# Altium PCB JacdacModuleTesterEc30 91.PcbDoc (part 1 of 2)
Units mm, origin at the board's own origin, x right, y up, seen from the top; angles counter-clockwise.
Board outline 25 x 48 mm, 2 copper layers (Top Layer, Bottom Layer), stack 1.525 mm thick; 43 components, 32 nets, 150 pads, 34 vias.
Unrouted connection lines stored in the file: 18.
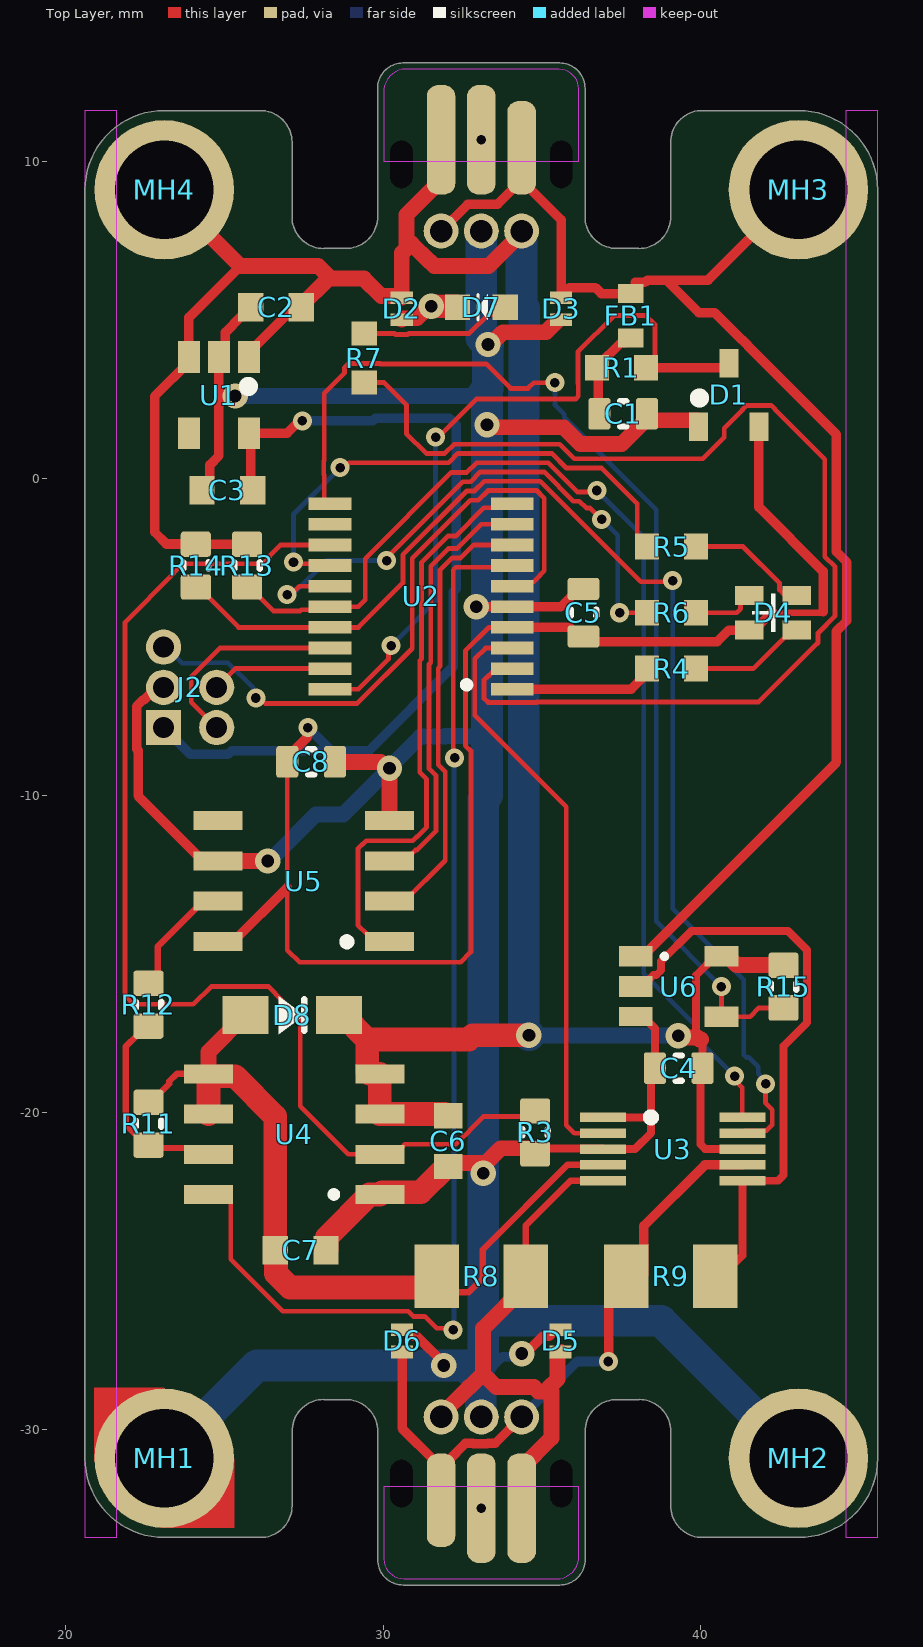
[diagram p0: Top Layer view]
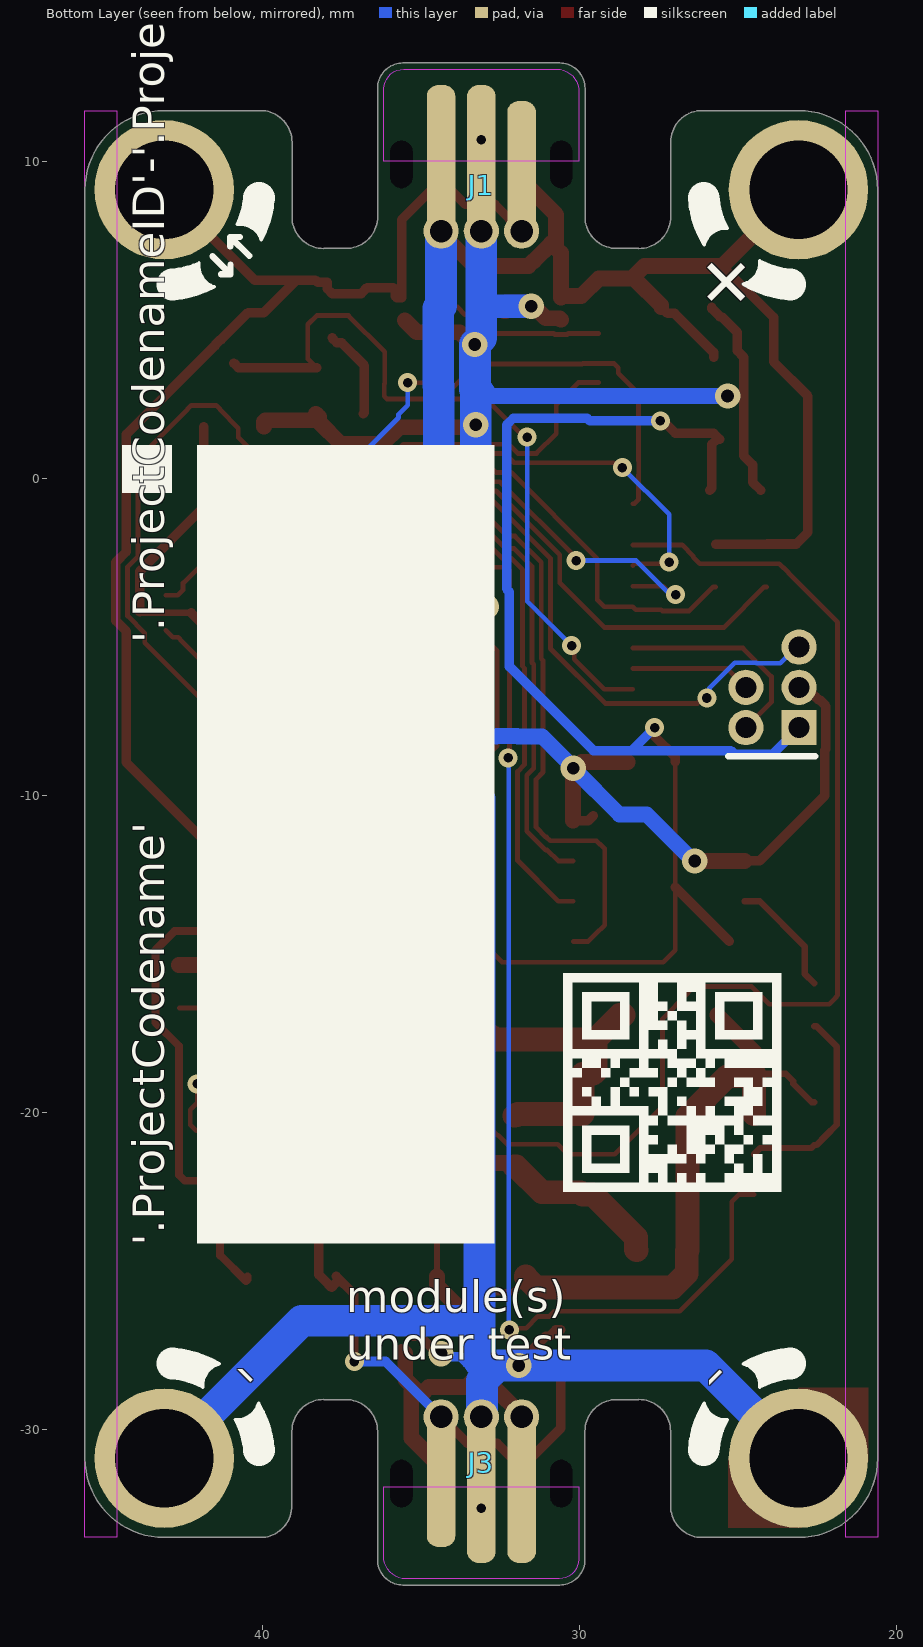
[diagram p1: Bottom Layer view, seen from below]
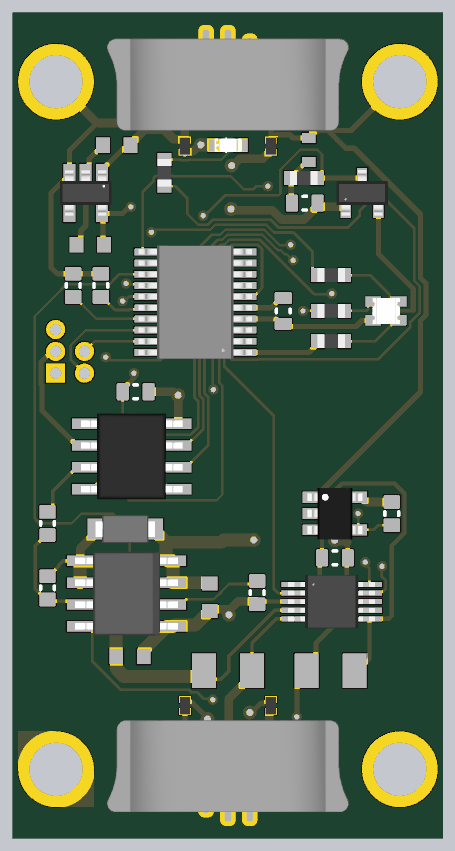
[diagram p2: 3D render of the assembled board from above, using the file's embedded part models]

## Layer stack, top to bottom
Top Solder: solder mask 0.0102, Solder Resist, Dk 3.5
Top Layer: signal copper 0.0356
Dielectric 1: core 1.454, FR-4, Dk 4.2
Bottom Layer: signal copper 0.0356
Bottom Solder: solder mask 0.0102, Solder Resist, Dk 3.5

## Board outline
23.1,-33.4 26.134,-33.4 26.133,-33.4 ccw(c26.133,-32.4) 27.133,-32.4 27.134,-32.4 27.134,-30.048 27.133,-30.048 cw(c28.133,-30.048) 28.133,-29.048 28.134,-29.05 28.834,-29.05 28.833,-29.05 cw(c28.833,-30.05) 29.833,-30.05 29.834,-30.05 29.834,-34.1 29.833,-34.1 ccw(c30.633,-34.1) 30.633,-34.9 30.634,-34.9 35.574,-34.9 35.573,-34.9 ccw(c35.573,-34.1) 36.373,-34.1 36.374,-34.098 36.374,-30.048 36.373,-30.05 cw(c37.373,-30.05) 37.373,-29.05 37.344,-29.05 38.074,-29.05 38.073,-29.048 cw(c38.073,-30.048) 39.073,-30.048 39.074,-30.048 39.074,-32.4 39.073,-32.4 ccw(c40.073,-32.4) 40.073,-33.4 40.074,-33.4 43.104,-33.4 43.1,-33.4 ccw(c43.1,-30.9) 45.6,-30.9 45.6,9.1 ccw(c43.1,9.1) 43.1,11.6 40.07,11.6 ccw(c40.07,10.6) 39.07,10.6 39.07,8.248 cw(c38.07,8.248) 38.07,7.248 38.07,7.25 37.37,7.25 cw(c37.37,8.25) 36.37,8.25 36.37,12.3 ccw(c35.57,12.3) 35.57,13.1 30.63,13.1 ccw(c30.63,12.3) 29.83,12.3 29.83,12.298 29.83,8.25 cw(c28.83,8.25) 28.83,7.25 28.86,7.25 28.13,7.25 28.13,7.248 cw(c28.13,8.248) 27.13,8.248 27.13,10.6 ccw(c26.13,10.6) 26.13,11.6 23.1,11.6 ccw(c23.1,9.1) 20.6,9.1 20.6,9.092 20.6,-30.9 ccw(c23.1,-30.9)

## Design rules (kind name [scope] priority, off if disabled: settings)
AssemblyTestPointUsage [All] p1: valid=2
BoardOutlineClearance [All] p1: gap=0.3 ignorepadtopadclearanceinfootprint=FALSE except(0: Arc-SplitContinuation Track-SplitContinuation SMDPad-SplitContinuation THPad-SplitContinuation Via-SplitContinuation Fill-SplitContinuation Poly-SplitContinuation Region-SplitContinuation Text-OutlineEdge Text-SplitContinuation; 0.2: Region-CavityEdge Region-CutoutEdge Region-SplitBarrior Text-CavityEdge Text-CutoutEdge Text-SplitBarrior)
Clearance [All] p1: gap=0.142 ignorepadtopadclearanceinfootprint=FALSE
ComponentClearance MH5.0KeepoutaAreaClearance [InComponent('MH1') or InComponent('MH2')  or InComponent('MH3') or InComponent('MH4') vs InComponent('D6') or InComponent('D7') or InComponent('D8') or InComponent('D9') or InComponent('D10') or InComponent('D11') or InComponent('D12') or InComponent('D13') or InComponent('C6') or InComponent('C7') or InComponent('C8')  or  InComponent('C9') or  InComponent('C12')] p1: gap=0 collisioncheckmode=3 verticalgap=0 showdistances=FALSE
ComponentClearance [All] p2: gap=0.2 collisioncheckmode=3 verticalgap=0.2 showdistances=FALSE
DiffPairsRouting [All] p1: maxlimit=2 minlimit=0.15 mostfreqgap=0.15 toplayer_minwidth=0.15 toplayer_maxwidth=2 toplayer_prefwidth=0.15 bottomlayer_minwidth=0.15 bottomlayer_maxwidth=2 bottomlayer_prefwidth=0.15 maxuncoupledlength=25
FabricationTestPointUsage [All] p1: valid=2 allowmultiple=FALSE
HoleSize [All] p1: absolutevalues=TRUE maxlimit=5 minlimit=0.2 maxpercent=80.000 minpercent=20.000
HoleToHoleClearance HoleToHoleClearance_J3_J4 [InComponent('J3') vs InComponent('J4')] p1: gap=2.54 allowstackedmicrovias=TRUE
HoleToHoleClearance [All] p2: gap=0.254 allowstackedmicrovias=TRUE
MinimumSolderMaskSliver [All] p1: minsoldermaskwidth=0.005
PlaneClearance [All] p1: clearance=0.3
PlaneConnect [All] p1: planeconnectstyle=Relief reliefexpansion=0.5 reliefentries=4 reliefconductorwidth=0.2 reliefairgap=0.3
PolygonConnect "PolygonConnect GND" [isVIA] p1: connectstyle=Relief reliefconductorwidth=0.2 reliefentries=4 polygonreliefangle="90 Angle" airgapwidth=0.2
PolygonConnect [All] p2: connectstyle=Relief reliefconductorwidth=0.2 reliefentries=4 polygonreliefangle="90 Angle" airgapwidth=0.2
RoutingVias RoutingVias_Power [InNetClass('Power')] p1: holewidth=0.4 width=0.8 viastyle="Through Hole" minholewidth=0.3 minwidth=0.6 maxholewidth=0.4 maxwidth=1
RoutingVias [All] p2: holewidth=0.3 width=0.6 viastyle="Through Hole" minholewidth=0.3 minwidth=0.6 maxholewidth=0.3 maxwidth=0.8
SilkToSilkClearance [All] p1: silktosilkclearance=0.001
SilkToSolderMaskClearance [IsPad] p1: minsilkscreentomaskgap=0.05 clearancetoexposedcopper=TRUE
SolderMaskExpansion [All] p1: expansion=0.075 istentingtop=FALSE
UnRoutedNet [All] p1: checkbadconnections=TRUE
ViasUnderSMD [not ( HasFootprint('JACDAC_EDGE_CONNECTOR_NO_TRACES') or HasFootprint('JACDAC_EDGE_CONNECTOR_NO_TRACES_CABLE_GUIDE') )] p1: allowed=FALSE
Width Width_Power [InNetClass('Power')] p1: maxlimit=1 minlimit=0.2 preferedwidth=0.5
Width [All] p2: maxlimit=1 minlimit=0.13 preferedwidth=0.13 minimp=50.000000 maximp=50.000000 favimp=50.000000
18 further rules are at their usual default settings.

## Classes and differential pairs
net class Power: GND JD_PWR JD_PWR_DUT JD_PWR_DUT2

## Components (designator, comment, footprint, x,y, rotation, side; value= is the part's Value field where it differs from the comment)
C1 "33pF" CAP0603 37.574,2.033 r180 top
C2 "CL10A475KP8NNNC" "CAP 0603 (1608) x 1.2mm" 26.627,5.402 r0 top
C3 "CL10A475KP8NNNC" "CAP 0603 (1608) x 1.2mm" 25.09,-0.375 r0 top
C4 "100nF" CAP0603 39.324,-18.6 r0 top
C5 "100nF" CAP0603 36.32,-4.238 r270 top
C6 "CL10A475KP8NNNC" "CAP 0603 (1608) x 1.2mm" 32.05,-20.9 r90 top
C7 "CL10A475KP8NNNC" "CAP 0603 (1608) x 1.2mm" 27.4,-24.34 r180 top
C8 "100nF" CAP0603 27.732,-8.94 r180 top
D1 "BAT54S" "NXP-BAT54S-TO-236AB - without outline" 40.904,2.633 r90 top
D2 "RCLAMP0521P-N" "TVS 0402 - L" 30.588,5.35 r270 top
D3 "RCLAMP0521P-N" "TVS 0402 - L" 35.614,5.35 r270 top
D4 "HSMF-C114" HSMF-C114 42.3,-4.238 r0 top
D5 "RCLAMP0521P-N" "TVS 0402 - L" 35.6,-27.2 r90 top
D6 "RCLAMP0521P-N" "TVS 0402 - L" 30.6,-27.2 r90 top
D7 "Everlight Elec'''" "0603 Orange" 33.1,5.4 r0 top
D8 "MBR120VLSFT3G" MBR120VLSFT3G 27.134,-16.925 r180 top
FB1 "TDK MPZ1608S102ATA00" "TDK MPZ1608 0.8mm - without outline" 37.808,5.127 r270 top
J1 "3 pin JACDAC edge connector" JACDAC_EDGE_CONNECTOR_NO_TRACES_CABLE_GUIDE 33.1,7.25 r180 bottom
J2 "Hack Connect Mini 1.27 mm pitch 2-row" HACK_CONNECT_MINI_5_X_1_27 23.079,-7.859 r0 top
J3 "3 pin JACDAC edge connector" JACDAC_EDGE_CONNECTOR_NO_TRACES_CABLE_GUIDE 33.1,-29.05 r0 bottom
MH1 "MH_7.0MMK_4.4MMC_3.1MMD_PTH" MH_7.0MMK_4.4MMC_3.1MMD_PTH 23.1,-30.9 r0 top
MH2 "MH_7.0MMK_4.4MMC_3.1MMD_PTH" MH_7.0MMK_4.4MMC_3.1MMD_PTH 43.1,-30.9 r0 top
MH3 "MH_7.0MMK_4.4MMC_3.1MMD_PTH" MH_7.0MMK_4.4MMC_3.1MMD_PTH 43.1,9.1 r0 top
MH4 "MH_7.0MMK_4.4MMC_3.1MMD_PTH" MH_7.0MMK_4.4MMC_3.1MMD_PTH 23.1,9.1 r0 top
R1 "220R" RC0603 37.52,3.489 r0 top
R3 "100k" RES0603 34.797,-20.625 r270 top
R4 "30R" RC0603 39.1,-6 r180 top
R5 "30R" RC0603 39.1,-2.15 r180 top
R6 "150R" RC0603 39.1,-4.238 r180 top
R7 "150R" RC0603 29.405,3.795 r90 top
R8 "KDV12FR200ET" RES1206 33.1,-25.164 r0 top value=0R2
R9 "KDV12FR200ET" RES1206 39.074,-25.164 r180 top value=0R2
R11 "4k3" RES0603 22.604,-20.35 r270 top
R12 "1k3" RES0603 22.604,-16.6 r90 top
R13 "4k3" RES0603 25.709,-2.75 r270 top
R14 "4k3" RES0603 24.096,-2.75 r270 top
R15 "100k" RES0603 42.629,-16.025 r270 top
U1 "3.3V LDO (see BOM)" MICRONE-SOT23-5 24.827,2.624 r270 top
U2 "STM32G030F6P6" 20-TSSOP 31.201,-3.725 r180 top
U3 "ADS1115IDGST" ADS1115IDGST 39.135,-21.15 r270 top
U4 "TPS76801QD" SOIC8 27.2,-20.682 r90 top
U5 "MCP41010T" MICROCHIP-SOIC8 27.5,-12.7 r90 top
U6 "74LVC1G66" TI-SOT23-5 39.324,-16.025 r0 top

## Footprints (in the part's own frame and the unit in brackets; to place one, negate y for a bottom-side part, rotate by r counter-clockwise, add the part's x,y. Pads: shape width x height; smd on the part's side, far side on the other; paste and mask are expansions set on the pad)
20-TSSOP [mm] "0.173\", 4.40mm Width"
  rect 1.35x0.4 smd: 1(-2.875,2.925) 2(-2.875,2.275) 3(-2.875,1.625) 4(-2.875,0.975) 5(-2.875,0.325) 6(-2.875,-0.325) 7(-2.875,-0.975) 8(-2.875,-1.625) 9(-2.875,-2.275) 10(-2.875,-2.925) 11(2.875,-2.925) 12(2.875,-2.275) 13(2.875,-1.625) 14(2.875,-0.975) 15(2.875,-0.325) 16(2.875,0.325) 17(2.875,0.975) 18(2.875,1.625) 19(2.875,2.275) 20(2.875,2.925)
  silkscreen extent -1.52,2.7 -1.35,2.87, body extent -3.3,-3.3 3.3,3.3, height 1.2
"0603 Orange" [mm]
  rect 0.8x0.8 smd paste-0.05: 1(-0.75,0) 2(0.75,0)
  silkscreen extent -0.1,-0.4 0.2,0.4, body extent -0.79,-0.4 0.81,0.4, height 0.4
ADS1115IDGST [mm]
  rect 0.3x1.45 smd: 1(-1,-2.2) 2(-0.5,-2.2) 3(0,-2.2) 4(0.5,-2.2) 5(1,-2.2) 6(1,2.2) 7(0.5,2.2) 8(0,2.2) 9(-0.5,2.2) 10(-1,2.2)
  silkscreen extent -1.13,-0.81 -0.87,-0.56, body extent -1.55,-2.53 1.55,2.53, height 1.09
CAP0603 [mm] "Chip Capacitor 0603, 2-Leads, Body 1.60x0.80mm, IPC Medium Density"
  rrect25% 0.7x1 smd: 1(-0.75,0) 2(0.75,0)
  silkscreen extent -0.1,-0.4 0.1,0.4, body extent -0.88,-0.48 0.87,0.47, height 0.9
"CAP 0603 (1608) x 1.2mm" [mm] "murata largest recogmended dimentions for 1608 +-0.2mm"
  rect 0.8x0.9 smd: 1(-0.8,0) 2(0.8,0)
  body extent -0.9,-0.5 0.9,0.5, height 1.2
HACK_CONNECT_MINI_5_X_1_27 [mm] "5 pins, 1.27mm x 1.676mm pitch"
  rect 1.11x1.11 hole 0.66: 1(0,0)
  round 1.11 hole 0.66: 2(1.676,0) 3(0,1.27) 4(1.676,1.27) 5(0,2.54)
HSMF-C114 [mm] "LED RGB DIFFUSED CHIP SMD"
  rect 0.9x0.6 smd mask+0.05: 1(-0.75,-0.55) 2(-0.75,0.55) 3(0.75,0.55) 4(0.75,-0.55)
  silkscreen extent -0.65,-0.6 0.07,0.6, body extent -0.8,-0.75 0.8,0.75, height 0.55
JACDAC_EDGE_CONNECTOR_NO_TRACES_CABLE_GUIDE [mm] "Jacdac 3 pin connector with no traces but with cable connector guide"
  rrect78% 0.9x2.95 smd far side paste-0.254 mask+0: 1(-1.27,3.175)
  round 1.11 / inner round 0.71 / far side round 1.1 hole 0.71 paste-1 mask+0: 1(1.27,0.55) 2(0,0.55) 3(-1.27,0.55)
  rrect78% 0.9x4.3 smd paste-1 mask+0: 1(1.27,2.5)
  rrect78% 0.9x4.8 smd paste-1 mask+0: 2(0,2.75) 3(-1.27,2.75)
  rrect78% 0.9x3.45 smd far side paste-0.254 mask+0: 2(0,3.425) 3(1.27,3.425)
  round 0 hole 0.7 slot 1.5 at 90 deg unplated: ""(-2.52,2.65) ""(2.52,2.65)
  Top Layer keep-out region: -3.075,2.75 -3.07,5.033 -2.987,5.341 -2.761,5.567 -2.453,5.65 -2.453,5.65 2.27,5.65 2.545,5.635 2.794,5.516 2.978,5.31 3.07,5.05 3.07,5.05 3.07,2.75
  Bottom Layer lines w0.2: -1.126,0.85 -1.27,0.85
  Bottom Layer keep-out region: -3.07,2.75 -3.07,5.033 -3.023,5.269 -2.889,5.469 -2.689,5.603 -2.453,5.65 -2.453,5.65 2.27,5.65 2.545,5.635 2.794,5.516 2.978,5.31 3.07,5.05 3.07,5.05 3.07,2.75
  body extent -7.03,-1 7.03,4.35, height 2.95
MBR120VLSFT3G [mm] "SODFL, 2-Leads, Body 1.65x3.60mm, IPC Medium Density"
  rect 1.45x1.2 smd: 1(-1.475,0) 2(1.475,0)
  silkscreen extent -0.38,-0.6 0.42,0.6, body extent -1.73,-0.82 1.72,0.82, height 0.95
MH_7.0MMK_4.4MMC_3.1MMD_PTH [mm] "Jacdac mounting hole 7.0mm clearance, 4.4 annualar ring and 3.1mm PTH"
  round 4.4 hole 3.1 mask+0.05: 1(0,0)
MICROCHIP-SOIC8 [mm]
  rect 0.6x1.55 smd: 1(-1.905,-2.7) 2(-0.635,-2.7) 3(0.635,-2.7) 4(1.905,-2.7) 5(1.905,2.7) 6(0.635,2.7) 7(-0.635,2.7) 8(-1.905,2.7)
  body extent -2.51,-2.96 2.51,2.96, height 1.75
MICRONE-SOT23-5 [mm]
  rect 1x0.7 smd: 1(-1.2,0.95) 2(-1.2,0) 3(-1.2,-0.95) 4(1.2,-0.95) 5(1.2,0.95)
  silkscreen extent -0.32,0.88 -0.23,0.97, body extent -1.32,-1.5 1.32,1.5, height 1.11
"NXP-BAT54S-TO-236AB - without outline" [mm] "SOT23, 3-Leads, Body 2.90x2.30mm, Pitch 0.95mm, IPC Medium Density"
  rect 0.9x0.6 smd: 1(-1,0.95) 2(-1,-0.95) 3(1,0)
  silkscreen extent -0.15,0.87 -0.05,0.97, body extent -1.32,-1.5 1.32,1.5, height 1.12
RC0603 [mil]
  rect 30x32 smd: 1(-30.5,0) 2(30.5,0)
  body extent -31,-16 32,16, height 28
RES0603 [mm] "Chip Resistor EIA0603, 2-Leads, Body 1.60x0.80mm, IPC Medium Density"
  rrect25% 0.8x0.95 smd: 1(-0.675,0)
  rrect20% 0.8x0.95 smd: 2(0.675,0)
  silkscreen extent -0.1,-0.4 0.1,0.4, body extent -0.87,-0.48 0.87,0.48, height 0.45
RES1206 [mm]
  rect 1.4x2 smd: 1(-1.4,0) 2(1.4,0)
  body extent -1.7,-0.9 1.7,0.9, height 0.64
SOIC8 [mm]
  rect 0.6x1.55 smd: 1(-1.905,-2.7) 2(-0.635,-2.7) 3(0.635,-2.7) 4(1.905,-2.7) 5(1.905,2.7) 6(0.635,2.7) 7(-0.635,2.7) 8(-1.905,2.7)
  silkscreen extent -2,-1.35 -1.8,-1.15, body extent -2.45,-3 2.45,3, height 1.63
"TDK MPZ1608 0.8mm - without outline" [mm]
  rect 0.6x0.8 smd: 1(-0.7,0) 2(0.7,0)
  body extent -0.8,-0.4 0.8,0.4, height 0.8
TI-SOT23-5 [mm]
  rect 1.06x0.65 smd: 1(-1.35,0.95) 2(-1.35,0) 4(1.35,-0.95) 5(1.35,0.95)
  rect 1.06x0.6 smd: 3(-1.35,-0.95)
  silkscreen extent -0.52,0.88 -0.37,1.02, body extent -1.6,-1.5 1.6,1.5, height 0.92
"TVS 0402 - L" [mm] "TVS 0402 RoHS"
  rect 0.4x0.7 smd paste-0.038 mask+0.05: 1(-0.35,0) 2(0.35,0)
  body extent -0.5,-0.3 0.5,0.3, height 0.5

## Part data
C1: library part CAP0603_GENERIC, "CAP generic 0603 SMD 33pF", Package Size=0603, Rated Voltage=10V
C2 C3 C6 C7: library part "4.7uF 10V X5R ±10% Samsung CL", "Generic 0603 capacitor 4.7uF 10V, e.g. Samsung CL10A475KP8NNNC", Capacitance=4.7µF, Case Code (Imperial)=0603, Case Code (Metric)=1608, Dielectric=X5R, Manufacturer=Samsung, Max Operating Temperature=85°C, Min Operating Temperature=-55°C, Package Quantity=1, Supplier Part Number 1=1276-1044-1-ND, Tolerance=10%, Voltage Rating=10V, Case/Package=0603, Contact Plating=Tin, Created By=shodges, Depth=0.8mm, Height=0.8mm, Length=1.6mm, Manufacturer Part Number=CL10A475KP8NNNC, Mount="Surface Mount", Packaging="Tape and Reel", Pricing 1="1=0.15, 10=0.109, 100=0.0513, 500=0.036, 1000=0.0298 (USD)", Radiation Hardening=No, Stock 1=40000, Supplier 1=Digi-Key, Supplier 2=Farnell, Supplier Part Number 2=3010071, Thickness=0.035inch, Width=0.031inch
C4 C5 C8: library part CAP0603_GENERIC, "CAP generic 0603 SMD 100nF", Package Size=0603, Rated Voltage=10V
D1: "DIODE ARRAY SCHOTTKY 30V SOT23", Manufacturer=Nexperia, Manufacturer Part Number=BAT54S,235, Supplier Part Number 1=1727-1868-1-ND, Category="Rectifier Diodes", ComponentLink1Description="NXP datasheet online", ComponentLink1URL=https://assets.nexperia.com/documents/data-sheet/BAT54_SER.pdf, Generic Part Number=BAT54S, Pricing 1="1=0.13000, 10=0.11900, 100=0.05610, 500=0.03326, 1000=0.02185, 5000=0.02138 (USD)", RoHS=No, Stock 1=14011, Supplier 1=Digi-Key, Supplier 2=Mouser, Supplier 3=RSComponents, Supplier Part Number 2=771-BAT54S235, Supplier Part Number 3=1707990
D2 D3 D5 D6: "Bidirectional 5V (Max) 6V 16V 3.5A (8/20us) 0402 TVS RoHS", Manufacturer="Born Semiconductor", Package=0402, Supplier1 Part Number=C316043, Checked By=?, ComponentLink1Description="Online datasheet", ComponentLink1URL=https://datasheet.lcsc.com/szlcsc/Bourne-Semicon-Shenzhen-RCLAMP0521P-N_C316043.pdf, Created By="D Gakure", Manufacturer Part Number=RCLAMP0521P-N, Supplier1=LCSC
D4: "Red, Green, Blue (RGB) 626nm Red, 525nm Green, 470nm Blue LED Indication - Discrete 1.9V Red, 3.4V Green, 3.4V Blue 0606 (1616 Metric)", Case Code (Imperial)=0606, Case Code (Metric)=1616, Color=Blue,Green,Red, Forward Current=20mA, Forward Voltage=3.4V, Lens Color=White, Manufacturer="Broadcom Avago", Max Operating Temperature=85°C, Min Operating Temperature=-40°C, Package Quantity=4000, Power Rating=78mW, Reverse Voltage=5V, Supplier Part Number 1=516-1795-1-ND, Supplier Part Number 10=?, Case/Package=0606, Category=Optoelectronics, Checked By=?, ComponentLink1Description="Online datasheet", ComponentLink1URL=https://docs.broadcom.com/docs/AV02-2451EN, Created By="D. Gakure", Depth=1.6mm, Dominant Wavelength=470nm, Height=0.35mm, Lead Free="Lead Free", Length=1.6mm, Lens Style=Diffused,Rectangular, Lens Transparency=Diffused, Luminous Intensity=70mcd, Manufacturer Part Number=HSMF-C114, Mount="Surface Mount", Number of Elements=3, Number of LEDs=3, Number of Pins=4, Packaging="Tape and Reel", Pricing 1="1=1.78000, 10=1.12500, 100=0.83250, 500=0.76500, 1000=0.63000, 2000=0.59850 (USD)", Pricing 2="1=1.56000, 10=0.97100, 25=0.87800, 50=0.78500, 100=0.69200, 500=0.60500 (GBP)", Pricing 3="1=1.69000, 10=1.13000, 50=1.13000, 100=0.85600, 1000=0.74800, 10000=0.74800 (USD)", Radiation Hardening=No, REACH SVHC="No SVHC", RoHS=Yes, Stock 1=20555, Stock 2=8134, Stock 3=14991, Supplier 1=Digi-Key, Supplier 2=Farnell, Supplier 3=Mouser, Supplier Part Number 2=1058362, Supplier Part Number 3=630-HSMF-C114, Test Current=20mA, Viewing Angle=145°, Wavelength=470nm, Width=1.5mm
D7: library part 19-217/S2C-AQ1R1B/3T, "LED ORANGE DIFFUSED 0603 SMD", Case Code (Imperial)=0603, Color=Orange, Manufacturer="Everlight Elec", Supplier 1 Part Number=C146215, Case/Package=0603, Colour=Orange, ComponentLink1Description="Online datasheet", ComponentLink1URL=https://datasheet.lcsc.com/lcsc/1912171731_Everlight-Elec-19-217-S2C-AQ1R1B-3T_C146215.pdf, Manufacturer Part Number=19-217/S2C-AQ1R1B/3T, Mount="Surface Mount", Supplier 1=LCSC
D8: "DIODE SCHOTTKY 20V 1A SOD123FL", Average Rectified Current=1A, Forward Voltage=340mV, Generic Part Number="(see BOM)", Manufacturer="ON Semiconductor", Max Forward Surge Current (Ifsm)=45A, Max Operating Temperature=125°C, Max Repetitive Reverse Voltage (Vrrm)=20V, Max Reverse Leakage Current=600uA, Min Operating Temperature=-65°C, Package Quantity=10000, Supplier Part Number 1=MBR120VLSFT3GOSCT-ND, Category="Schottky Diodes", ComponentLink4Description="On Semi datasheet online", ComponentLink4URL=https://datasheet.ciiva.com/6380/mbr120vlsft1-d-6380910.pdf, Current Rating=1A, Element Configuration=Single, Forward Current=1A, Halogen Free="Halogen Free", Lead Free="Lead Free", Manufacturer Part Number=MBR120VLSFT3G, Max Reverse Voltage (DC)=20V, Max Surge Current=45A, Number of Pins=2, Output Current=1A, Packaging="Tape and Reel", Peak Non-Repetitive Surge Current=45A, Peak Reverse Current=600uA, Polarity=Standard, Pricing 1="1=0.39000, 10=0.28600, 100=0.19920, 500=0.12616, 1000=0.10292, 2000=0.09960, 5000=0.09628 (USD)", Radiation Hardening=No, REACH SVHC="No SVHC", RoHS=Yes, Stock 1=32481, Supplier 1=Digi-Key, Supplier 2=Mouser, Supplier 3=RSComponents, Supplier Part Number 2=863-MBR120VLSFT3G, Supplier Part Number 3=1867479, Voltage Rating (DC)=20V
FB1: "0603 1k@100MHz 0.8A chip", Case Code (Imperial)=0603, Case Code (Metric)=1608, Current Rating=800mA, DC Resistance (DCR)=300mR, Manufacturer=TDK, Manufacturer Part Number=MPZ1608S102ATA00, Package Quantity=4000, Supplier Part Number 1=445-8694-1-ND, Tolerance=25%, Case/Package=0603, ComponentLink2Description="datasheet online", ComponentLink2URL=https://www.mouser.co.uk/datasheet/2/400/eads_commercial_power_mpz1608_en-923650.pdf, ComponentLink3Description=datasheet, ComponentLink3URL="Y:\System\Altium\Libraries 2014\TDK\Datasheets\eads_commercial_power_mpz1608_en-923650.pdf", Core Material=Ferrite, Height=0.037inch, Impedance="1kR @ 100MHz", Length=0.063inch, Max DC Current=800mA, Mount="Surface Mount", Packaging="Tape and Reel", Pricing 1="1=0.1, 10=0.079, 25=0.0716, 50=0.0644, 100=0.0472, 250=0.03432, 500=0.03146, 1000=0.02717 (USD)", Stock 1=113542, Supplier 1=Digi-Key, Supplier 2=Mouser, Supplier Part Number 2=810-MPZ1608S102ATA00, Width=0.031inch
J1 J3: library part "Jacdac edge connector", "3 pin Jacdac edge connector 1.27mm pitch", Manufacturer Part Number=JACDAC_EDGE_CONNECTOR, Checked By=?, ComponentLink1Description="Yuliang JACDAC cable connector drawing online", ComponentLink1URL=https://github.com/microsoft/jacdac-mdk/blob/main/connector/JACDAC-Connector-by-Yuliang-2020-11-28.pdf, ComponentLink2Description="JACDAC PCB edge connector spec onlin", ComponentLink2URL=https://github.com/microsoft/jacdac-mdk/blob/main/connector/JACDAC_PCB_Edge_Connector_Drawing_JD-PEC-01_rev_01.pdf, Created By="D. Gakure", PCB Type="1.6mm FR4"
J2: library part HACK_CONNECT_MINI
MH1 MH2 MH3 MH4: "Mounting Hole 7.0mm keepout, 4.4mm annualar ring and 3.1mm Drill PTH"
R1: library part RC0603FR-07220RL, "Res Thick Film 0603 220 Ohm 1% 0.1W(1/10W) ±100ppm/°C Pad SMD T/R", Case Code (Imperial)=0603, Case Code (Metric)=1608, Manufacturer 1=Yageo, Max Operating Temperature=155°C, Max Power Dissipation=100mW, Min Operating Temperature=-55°C, Package Quantity=1, Resistance Tolerance=1%, Resistor Type="Thick Film", Supplier Part Number 1=311-220HRCT-ND, Temperature Coefficient=100ppm/°C, Voltage Rating=50V, Case/Package=0603, Category="Chip SMD Resistors", ComponentLink1Description="Online datasheet", ComponentLink1URL=https://datasheet.ciiva.com/11819/0900766b80f96399-11819290.pdf, Construction=Rectangular, Depth=0.8mm, Features="Moisture Resistant", Height=0.022inch, Lead Free="Lead Free", Length=1.6mm, Manufacturer Part Number 1=RC0603FR-07220RL, Military Standard=Not, Number of Pins=2, Number of Terminations=2, Packaging="Tape and Reel", Power Rating=100mW, Pricing 1="1=0.10000, 10=0.02400, 100=0.00970, 1000=0.00436, 2500=0.00378 (USD)", REACH SVHC="No SVHC", Resistance=220R, RoHS=Yes, RoHS Compliant=Yes, Series=RC, Size Code=0603, Stock 1=242327, Supplier 1=Digi-Key, Supplier 2=Farnell, Supplier 3=RSComponents, Supplier 4=Mouser, Supplier 5=LCSC, Supplier Part Number 2=9238409, Supplier Part Number 3=1995497, Supplier Part Number 4=603-RC0603FR-07220RL, Supplier Part Number 5=C107696, Termination=SMD/SMT, Tolerance=1%, Voltage Rating (DC)=50V, Width=0.031inch
R3 R15: library part RES0603_GENERIC, "Generic 0603 chip resistor 100k", Manufacturer=Generic, Package Size=0603, Power=*mW, Tolerance=5%
R4 R5: library part RC0603FR-0730RL, "Res Thick Film 0603 30 Ohm 1% 0.1W(1/10W) ±100ppm/C Pad SMD T/R", Case Code (Imperial)=0603, Case Code (Metric)=1608, Manufacturer 1=Yageo, Max Operating Temperature=155°C, Max Power Dissipation=100mW, Min Operating Temperature=-55°C, Package Quantity=1, Resistor Type="Thick Film", Supplier Part Number 1=311-30.0HRCT-ND, Temperature Coefficient=100ppm/°C, Tolerance=1%, Voltage Rating=50V, Case/Package=0603, Category="Chip SMD Resistors", ComponentLink1Description="Online datasheet", ComponentLink1URL=https://datasheet.ciiva.com/11819/0900766b80f96399-11819290.pdf, ComponentLink2Description=https://datasheet.ciiva.com/11819/0900766b80c66297-11819676.pdf?src-supplier=RSComponents, ComponentLink2URL=https://datasheet.ciiva.com/11819/0900766b80c66297-11819676.pdf?src-supplier=RSComponents, ComponentLink3Description=https://datasheet.ciiva.com/2455/pyu-r-int-thick-7-2455119.pdf?src-supplier=Digi-Key, ComponentLink3URL=https://datasheet.ciiva.com/2455/pyu-r-int-thick-7-2455119.pdf?src-supplier=Digi-Key, ComponentLink4Description=https://datasheet.ciiva.com/2455/pyu-r-int-thick-7-2455120.pdf?src-supplier=Digi-Key, ComponentLink4URL=https://datasheet.ciiva.com/2455/pyu-r-int-thick-7-2455120.pdf?src-supplier=Digi-Key, ComponentLink5Description=https://datasheet.ciiva.com/2455/pyu-r-int-thick-7-2455121.pdf?src-supplier=Digi-Key, ComponentLink5URL=https://datasheet.ciiva.com/2455/pyu-r-int-thick-7-2455121.pdf?src-supplier=Digi-Key, Construction=Rectangular, Depth=0.8mm, Features="Moisture Resistant", Height=0.022inch, Lead Free="Lead Free", Length=0.063inch, Manufacturer Part Number 1=RC0603FR-0730RL, Military Standard=Not, Mount="Surface Mount", Number of Terminations=2, Packaging="Tape and Reel", Power Rating=100mW, Pricing 1="1=0.10000, 10=0.02400, 100=0.00970, 1000=0.00436, 2500=0.00378 (USD)", Resistance=30R, RoHS=Yes, RoHS Compliant=Yes, Series=RC, Size Code=0603, Stock 1=181493, Supplier 1=Digi-Key, Supplier 2=Farnell, Supplier 3=Mouser, Supplier 5=LCSC, Supplier Part Number 2=3495813, Supplier Part Number 3=603-RC0603FR-0730RL, Supplier Part Number 5=C128060, Technology="THICK FILM", Termination=SMD/SMT, Voltage Rating (DC)=50V, Width=0.031inch
R6 R7: library part RC0603FR-07150RL, "Res General Purpose Thick Film 0603 150 Ohm 1% 1/10W ±100ppm/°C Molded SMD Paper T/R", Case Code (Imperial)=0603, Case Code (Metric)=1608, Manufacturer 1=Yageo, Max Operating Temperature=155°C, Max Power Dissipation=100mW, Min Operating Temperature=-55°C, Package Quantity=5000, Resistance Tolerance=1%, Resistor Type="Thick Film", Supplier Part Number 1=311-150HRCT-ND, Temperature Coefficient=100ppm/°C, Voltage Rating=50V, Case/Package=0603, Category="Chip SMD Resistors", ComponentLink1Description="Online datasheet", ComponentLink1URL=https://datasheet.ciiva.com/11819/0900766b80f96399-11819290.pdf, Construction=Rectangular, Depth=0.8mm, Features="Moisture Resistant", Height=0.45mm, Lead Free="Lead Free", Length=1.6mm, Manufacturer Part Number 1=RC0603FR-07150RL, Military Standard=Not, Number of Pins=2, Number of Terminations=2, Packaging="Tape and Reel", Power Rating=100mW, Pricing 1="1=0.10000, 10=0.02400, 100=0.00970, 1000=0.00436, 2500=0.00378 (USD)", REACH SVHC="No SVHC", Resistance=150R, RoHS=Yes, RoHS Compliant=Yes, Series=RC, Size Code=0603, Stock 1=2262542, Supplier 1=Digi-Key, Supplier 2=Farnell, Supplier 3=RSComponents, Supplier 4=Mouser, Supplier 5=LCSC, Supplier Part Number 2=9238387, Supplier Part Number 3=1995464, Supplier Part Number 4=603-RC0603FR-07150RL, Supplier Part Number 5=C114608, Termination=SMD/SMT, Tolerance=1%, Voltage Rating (DC)=50V, Width=0.8mm
R8 R9: "Res 200mOhm 1% 1/2W 1206", Manufacturer 1=Ohmite, Package Size=1206, Power=500mW, Supplier Part Number 1=273-KDV12FR200ETCT-ND, Tolerance=1%, Category="Chip SMD Resistors", ComponentLink1Description="Ohmite datasheet online", ComponentLink1URL=https://www.ohmite.com/assets/docs/res_kdv.pdf, Manufacturer Part Number 1=KDV12FR200ET, Pricing 1="1=0.31000, 10=0.26400, 25=0.19200, 50=0.13920, 100=0.10320, 250=0.07920, 500=0.06240, 1000=0.04320 (USD)", RoHS=Yes, Stock 1=23605, Supplier 1=Digi-Key, Supplier 2=Farnell, Supplier 3=Mouser, Supplier Part Number 2=3273737, Supplier Part Number 3=588-KDV12FR200ET
R11 R13 R14: library part RES0603_GENERIC, "Generic 0603 chip resistor 4k3", Manufacturer=Generic, Package Size=0603, Power=*mW, Tolerance=1%
R12: library part RES0603_GENERIC, "Generic 0603 chip resistor 1k3", Manufacturer=Generic, Package Size=0603, Power=*mW, Tolerance=1%
U1: library part ME6211C33M5G-N, "6V 260mV @ 200mA(typ) - - Fixed 3.3V SOT-23-5 Linear Voltage Regulators (LDO) ROHS", Case/Package=SOT-23-5, Dropout Voltage=200mV, Manufacturer="MICRONE(Nanjing Micro One Elec)", Max Input Voltage=6, Min Output Voltage=3.3V, Output Current=500mA, Supplier Part Number=C82942, Category="Voltage Regulators - Linear", Checked=?, ComponentLink3Description="On Semi datasheet online", ComponentLink3URL=https://datasheet.lcsc.com/lcsc/1811131510_MICRONE-Nanjing-Micro-One-Elec-ME6211C33M5G-N_C82942.pdf, Created=DG, Manufacturer Part Number="3.3V LDO (see BOM)", Mount="Surface Mount", Number of Regulators=1, Output Configuration=Positive, Output Type=Fixed, Pricing 1="1=0.33000, 10=0.24900, 25=0.21760, 100=0.12440, 250=0.11664, 500=0.09330, 1000=0.07153 (USD)", Stock 1=32529, Supplier 1=LCSC
U2: "ARM® Cortex®-M0+ series IC 64MHz 32KB 20-TSSOP", Manufacturer 1=STMicroelectronics, Supplier Part Number 1=497-STM32G030F6P6-ND, Supplier Part Number 10=C724040, Category=Microcontrollers, ComponentLink1Description="Online datasheet", ComponentLink1URL=https://www.st.com/resource/en/datasheet/stm32g030f6.pdf, ComponentLink2Description="Online reference manual", ComponentLink2URL=https://www.st.com/resource/en/reference_manual/rm0454-stm32g0x0-advanced-armbased-32bit-mcus-stmicroelectronics.pdf, Manufacturer Part Number 1=STM32G030F6P6, Pricing 1="1=1.85000, 10=1.65300, 74=1.56905, 148=1.28892, 296=1.20486, 444=1.06475, 962=0.93400 (USD)", RoHS=Yes, RoHS Compliant=Yes, Supplier 1=Digi-Key, Supplier 2=Farnell, Supplier 3=Mouser, Supplier 10=LCSC, Supplier Part Number 2=3294301, Supplier Part Number 3=511-STM32G030F6P6
U3: "IC ADC 16-BIT I2C PROGBL 10-MSOP", Input Voltage="4.096 V", Manufacturer="Texas Instruments (TI)", Max Processing Temp=260, Maximum Single Supply Voltage="5.5 V", Minimum Single Supply Voltage="2 V", Operating Temperature="-40 to 125 C", Package=10VSSOP, Polarity of Input Voltage=Bipolar, Supplier Part Number 1=296-24934-1-ND, Typical Power Dissipation="0.9 mW", Typical Single Supply Voltage="3.3 V", Voltage Reference=Internal, Voltage Supply Source=Single, Architecture=Delta-Sigma, Category=ADC, ComponentLink1Description="online datasheet", ComponentLink1URL=http://www.ti.com/lit/ds/symlink/ads1115.pdf, Differential Input=Yes, Digital Interface Type="Serial (2-Wire, I2C)", Digital Supply Support=No, Full Scale Error="0.15 % of FSR", Input Signal Type=Single-Ended|Differential, Input Type=Voltage, Integral Nonlinearity Error="1 LSB", Lead Finish=Gold, Manufacturer Part Number=ADS1115IDGST, Mounting="Surface Mount", Number of ADCs=1, Number of Analog Inputs=4|2, Pricing 1="1=6.51, 10=5.847, 100=4.7903 (USD)", Resolution="16 Bit", Sample and Hold=No, Sampling Rate="860 sps", Single-Ended Input=Yes, Stock 1=6232, Supplier 1=Digikey
U4: "1-A, 10-V, low-dropout voltage regulator with power good & enable 8-SOIC -40 to 125", Case/Package=D, Current Rating=1A, Dropout Voltage=230mV, Input Bias Current=85uA, Manufacturer 1="Texas Instruments", Max Input Voltage=10V, Max Operating Temperature=125°C, Max Output Voltage=5.5V, Max Power Dissipation=904.15mW, Min Current Limit=1.2A, Min Input Voltage=2.7V, Min Operating Temperature=-40°C, Min Output Voltage=1.2V, Package Quantity=75, Quiescent Current=80uA, Reference Voltage=1.1834V, Supplier Part Number 1=296-2743-5-ND, Accuracy=2%, Category="Voltage Regulators - Linear", ComponentLink1Description="TI datasheet online", ComponentLink1URL=https://datasheet.lcsc.com/lcsc/1810181640_Texas-Instruments-TPS76801QDR_C20030.pdf, Height=1.58mm, Lead Free="Lead Free", Length=4.9mm, Manufacturer Part Number 1=TPS76801QD, Max Output Current=1A, Number of Outputs=1, Number of Pins=8, Number of Regulators=1, Output Current=1A, Output Type=Adjustable,Fixed, Output Voltage=5.5V, Packaging=Rail/Tube, Polarity=Positive, Power Dissipation=904.15mW, Power Rating=904.15mW, Pricing 1="1=4.25000, 10=3.81700, 25=3.60840, 100=3.12740, 250=2.96700, 500=2.66228, 1000=2.64775 (USD)", Radiation Hardening=No, REACH SVHC="No SVHC", RoHS=Yes, RoHS Compliant=Yes, Series=-, Supplier 1=Digi-Key, Supplier 2=Farnell, Supplier 3=RSComponents, Supplier 4=Mouser, Supplier Part Number 2=3122534, Supplier Part Number 3=1624919, Supplier Part Number 4=595-TPS76801QD, Width=3.91mm
U5: "Digital Pot; 256 steps; SPI; 10kohms; single channel8 SOIC 3.90mm(.150in) T/R", Case/Package=SOIC, Frequency=10MHz, Manufacturer 1=Microchip, Manufacturer Part Number 1=MCP41010T-I/SN, Max Operating Temperature=85°C, Max Supply Voltage=5.5V, Min Operating Temperature=-40°C, Min Supply Voltage=2.7V, Nominal Supply Current=340uA, Package Quantity=3300, Quiescent Current=10nA, Resistance=10kR, Resistor Type=Potentiometer, Supplier Part Number 1=MCP41010T-I/SNCT-ND, Temperature Coefficient=800ppm/°C, Tolerance=20%, Voltage=5V, Category="Digital Potentiometers", ComponentLink1Description="Microchip datasheet online", ComponentLink1URL=https://ww1.microchip.com/downloads/en/DeviceDoc/11195c.pdf, Interface=SPI,Serial, Lead Free="Lead Free", Memory Type=Volatile, Mount="Surface Mount", Number of Channels=1, Number of Circuits=1, Number of Elements=1, Number of Pins=8, Number of Positions=256, Number of Taps=256, Packaging="Tape and Reel", Pricing 1="1=1.74000, 25=1.59000 (USD)", Radiation Hardening=No, RoHS=Yes, RoHS Compliant=Yes, Series=-, Stock 1=1862, Supplier 1=Digi-Key, Supplier 2=Farnell, Supplier 3=Mouser, Supplier Part Number 2=2857765, Supplier Part Number 3=579-MCP41010T-I/SN, Supply Current=340uA, Taper=Linear
U6: library part SN74LVC1G66DBVR, "1 Circuit IC Switch 1:1 10 Ohm SOT-23-5", Case/Package=SOT-23, High Level Output Current=50mA, Manufacturer 1="Texas Instruments", Max Operating Temperature=85°C, Max Supply Current=10uA, Max Supply Voltage=5.5V, Min Operating Temperature=-40°C, Min Supply Voltage=1.65V, Nominal Supply Current=1uA, On-State Resistance=10R, Package Quantity=3000, Supplier Part Number 1=296-13253-1-ND, Bandwidth=195MHz, Category="Interface ICs", ComponentLink1Description="online datasheet", ComponentLink1URL=https://datasheet.lcsc.com/lcsc/1809251629_Texas-Instruments-SN74LVC1G66DBVR_C133643.pdf, Contact Plating=Gold, Height=1.3mm, Lead Free="Lead Free", Length=3.05mm, Low Level Output Current=50mA, Manufacturer Part Number 1=SN74LVC1G66DBVR, Mount="Surface Mount", Number of Bits=1, Number of Channels=1, Number of Inputs=1, Number of Outputs=1, Number of Pins=5, Operating Supply Current=10uA, Output Current=50mA, Packaging="Tape and Reel", Polarity=Non-Inverting, Pricing 1="1=0.48000, 10=0.36200, 25=0.32640, 100=0.22560, 250=0.18996, 500=0.15434, 1000=0.11872 (USD)", Propagation Delay=600ps, Radiation Hardening=No, REACH SVHC="No SVHC", RoHS=Yes, RoHS Compliant=Yes, Series=74LVC, Supplier 1=Digi-Key, Supplier 2=Farnell, Supplier 3=RSComponents, Supplier 4=Mouser, Supplier Part Number 2=3118254, Supplier Part Number 3=8096012, Supplier Part Number 4=595-SN74LVC1G66DBVR, Supply Current=1uA, Supply Type=Single, Termination=SMD/SMT, Throw Configuration=SPST, Turn-Off Delay Time=5ns, Turn-On Delay Time=4.2ns, Weight=0.000395oz, Width=1.75mm

## Via types
v1: diameter 0.6, hole 0.3, Top Layer to Bottom Layer, tented both sides, 22 vias
v2: diameter 0.8, hole 0.4, Top Layer to Bottom Layer, tented both sides, 12 vias

## Nets (pads, with @x,y where several pads share a name; then routed paths per layer and width w, separated by ;. In a path a pad name is that pad's centre, name@x,y a point inside that pad or via, vN(x,y) a via of type N, cw(c..) or ccw(c..) an arc to the next point about the centre after c; other vN are vias at no path point)
3V3: C3.2 C5.2 C8.2 D1.2 D4.1 J2.1 U1.5 U2.4 U5.8 | length 72.4
  Top Layer w0.15: C8.2 26.982,-12.898 26.982,-14.874 27.367,-15.259 32.447,-15.259 32.773,-14.934 32.773,-8.598 32.6,-8.425 32.6,-5.442 33.342,-4.7 U2.4
  Top Layer w0.2: 42.25,-4.238 43.84,-4.238 43.89,-4.188
  Top Layer w0.3: U5.8@25.275,-14.605 26.982,-12.898 ; C3.2 25.834,-0.318 25.834,1.074 25.677,1.23 25.584,1.23 U1.5 26.977,1.424 27.367,1.814 v1(27.454,1.814) ; C8.2 26.982,-8.79 27.632,-8.139 v1(27.632,-7.859) ; U2.4 35.882,-4.7 36.17,-4.988 C5.2 36.48,-5.148 40.539,-5.148 40.899,-4.788 D4.1 41.7,-4.788 42.25,-4.238 ; D1.2 41.854,-0.909 43.878,-2.933 43.878,-4.2 43.89,-4.188
  Bottom Layer w0.3: J2.1 23.926,-8.706 25.106,-8.706 25.228,-8.584 28.357,-8.584 ; v1(27.454,1.814) 29.678,1.814 29.758,1.894 32.094,1.894 32.302,1.686 32.302,-3.489 32.213,-3.579 32.213,-5.935 29.564,-8.584 28.357,-8.584 ; v1(27.632,-7.859) 28.357,-8.584
ADC_ALERT: U2.3 U3.2 | length 18.5
  Top Layer w0.15: U2.3 33.234,-5.35 32.892,-5.692 32.892,-7.475 35.776,-10.359 35.776,-20.398 36.028,-20.65 U3.2
CS: U2.10 U5.1 | length 18.2
  Top Layer w0.15: U5.1 29.725,-14.605 29.5,-14.38 29.208,-14.088 29.208,-11.675 29.335,-11.548 29.352,-11.548 29.47,-11.43 30.93,-11.43 31.048,-11.312 31.065,-11.312 31.375,-11.002 31.375,-9.488 31.155,-9.268 31.155,-5.745 31.214,-5.687 31.214,-2.648 32.042,-1.82 32.288,-1.82 33.182,-0.925 33.951,-0.925 U2.10
GND: C1.1 C2.1 C3.1 C4.1 C5.1 C6.1 C7.1 C8.1 D1.1 D2.2 D3.2 D5.2 D6.2 D7.1 J1.2 J2.3 J3.2 MH1.1 MH2.1 R3.2 U1.2 U2.5 U3.1 U3.3 U4.1 U5.4 U5.6 U6.3 | length 136
  Top Layer w0.25: R3.2@34.797,-21.125 34.809,-21.137 36.923,-21.137 U3.3 37.949,-21.15 38.449,-20.65 38.449,-20.15 ; U3.1 38.449,-20.15 ; U6.3 38.204,-16.975 38.574,-17.345 C4.1 38.449,-18.725 38.449,-20.15
  Top Layer w0.3: J2.3 22.86,-6.589 22.559,-6.89 22.473,-6.976 22.439,-6.976 22.232,-7.183 22.232,-8.535 22.276,-8.579 22.276,-10.016 24.325,-12.065 U5.6 ; C3.1 24.54,-0.125 24.54,0.425 24.827,0.712 24.827,2.595 ; v2(25.335,2.597) 25.333,2.595 24.827,2.595 ; C2.1 25.827,5.352 25.577,5.102 25.527,5.102 25.027,4.602 25.027,4.024 U1.2 24.827,2.595 ; U5.4@29.575,-10.645 29.725,-10.795 U5.4 ; D6.2 30.75,-26.85 30.958,-27.058 31.071,-27.058 31.915,-27.902 v2(31.915,-27.975) ; v2(32.94,-4.05) U2.5 35.608,-4.05 36.17,-3.488 C5.1 ; v2(34.37,-27.6) 34.488,-27.6 35.03,-27.058 35.242,-27.058 35.4,-26.9 35.55,-26.9 D5.2
  Top Layer w0.5: U5.6 v2(26.365,-12.065) ; C8.1 29.922,-8.94 30.122,-9.14 v2(30.204,-9.14) 30.204,-10.791 U5.4 ; D2.2 30.638,5.05 31.069,5.05 v2@31.386,5.368 ; C6.1 32.164,-21.586 v2@33.161,-21.586 ; v2@33.218,-21.618 33.711,-21.125 R3.2@34.797,-21.125 ; v2(33.28,1.694) 33.338,1.637 33.55,1.637 33.576,1.61 35.693,1.61 36.221,1.083 37.523,1.083 38.224,1.783 38.224,1.933 C1.1 ; v2(33.312,4.22) 33.393,4.22 33.781,4.608 35.134,4.608 D3.2@35.514,4.988 ; C1.1@38.324,1.933 38.424,1.833 39.904,1.833 39.954,1.783 D1.1
  Top Layer w0.75: C7.1 28.225,-24.315 28.225,-23.937 29.575,-22.587 U4.1 29.975,-22.512 31.188,-22.512 32,-21.7 C6.1 ; v2(31.525,5.425) 32.325,5.425 D7.1
  Bottom Layer w0.3: 33.088,2.597 33.161,2.67 ; 33.1,-27.904 33.554,-27.904 33.762,-27.696 34.274,-27.696 v2(34.37,-27.6)
  Bottom Layer w0.5: v2(25.335,2.597) 33.088,2.597 ; v2(26.365,-12.065) 26.42,-12.065 27.882,-10.602 28.741,-10.602 v2(30.204,-9.14) 30.204,-9.119 31.183,-8.139 31.95,-8.139 31.969,-8.12 32.615,-8.12 32.634,-8.139 33.28,-8.139
  Bottom Layer w0.75: v2(31.525,5.425) 33.075,5.425 33.1,5.4
  Bottom Layer w1: MH1.1 26.025,-27.975 32.597,-27.975 33.079,-28.458 33.079,-29.579 J3.2@33.1,-29.6 ; 33.1,-27.904 33.161,-27.843 33.161,-26.564 ; J1.2@33.1,7.8 33.1,5.4 33.1,4.432 v2(33.312,4.22) ; v2@33.3,4.1 33.3,2.809 33.161,2.67 33.28,2.551 33.28,-8.139 33.28,-9.993 33.161,-10.113 v2(33.161,-21.915) 33.161,-26.564 ; MH2.1 38.764,-26.564 33.161,-26.564
  other v1: 33.1,-32.475 33.1,10.675
JD_DATA: D3.1 FB1.1 J1.1 MH3.1 U6.1 | length 44.7
  Top Layer w0.3: J1.1@31.83,7.8 32.66,8.63 32.672,8.642 33.612,8.642 J1.1@34.37,9.4 ; J1.1@34.37,10.425 J1.1@34.37,9.471 ; U6.1 38.179,-15.075 44.298,-8.956 44.298,-4.819 44.624,-4.492 44.624,-2.641 44.298,-2.315 44.298,1.385 41.496,4.187 41.496,4.204 41.325,4.375 41.308,4.375 40.457,5.226 39.957,5.226 38.93,6.252 ; MH3.1 40.252,6.252 38.93,6.252 ; J1.1@34.37,9.4 35.614,8.156 D3.1 35.764,5.7 35.814,5.75 35.814,5.95 35.878,6.014 36.7,6.014 36.886,5.827 FB1.1 37.958,5.977 37.958,6.177 38.258,6.177 38.333,6.252 38.93,6.252 ; J1.1@34.37,9.4 J1.1@34.37,9.471 ; J1.1@34.37,9.4 J1.1@34.37,9.471
JD_DATA_DUT: R9.1 U3.6 U6.2 | length 19
  Top Layer w0.25: U6.2 38.179,-16.025 38.379,-15.825 38.379,-15.813 38.525,-15.667 38.614,-15.667 38.771,-15.511 38.771,-15.228 39.724,-14.274 42.771,-14.274 43.371,-14.874 43.371,-17.164 42.629,-17.906 42.629,-21.975 42.454,-22.15 U3.6 41.335,-24.503 40.524,-25.314 40.474,-25.264 R9.1
JD_DATA_DUT2: D6.1 J3.1 R9.2 U3.7 | length 19.8
  Top Layer w0.3: D6.1 30.6,-29.96 31.645,-31.005 31.835,-31.005 31.87,-30.97 32.06,-30.97 32.6,-30.43 32.835,-30.43 32.853,-30.448 33.287,-30.448 33.305,-30.43 33.54,-30.43 J3.1@34.37,-29.6 ; v1(37.103,-27.85) 37.124,-27.83 37.124,-25.714 R9.2 ; R9.2@37.674,-25.364 37.824,-25.514 37.899,-25.439 37.924,-25.414 38.224,-25.114 38.224,-23.575 40.148,-21.65 U3.7
  Bottom Layer w0.3: J3.1@34.37,-29.6 36.12,-27.85 v1(37.103,-27.85)
JD_DATA_MCU: D1.3 R1.2 U2.20 | length 23.5
  Top Layer w0.15: U2.20 29.225,-6.65 30.17,-5.705 30.17,-5.364 v1(30.256,-5.278) ; v1(31.656,1.302) 31.743,1.302 32.942,2.502 36.071,2.502 36.159,2.589 36.159,2.98 36.147,2.992 36.147,3.987 37.293,5.132 38.293,5.132 38.574,4.852 38.574,3.768 R1.2
  Top Layer w0.3: R1.2 38.413,3.489 40.759,3.489 D1.3
  Bottom Layer w0.15: v1(30.256,-5.278) 31.652,-3.883 31.652,1.298 v1(31.656,1.302)
JD_PWR: C2.2 C4.2 C6.2 D2.1 D8.1 J1.3 MH4.1 R13.1 R14.1 R15.1 U1.1 U1.3 U3.8 U4.3 U4.4 U6.5 | length 87.4
  Top Layer w0.25: 40.026,-17.692 40.026,-17.633 39.875,-17.481 39.875,-15.669 40.469,-15.075 U6.5 ; 40.074,-17.633 C4.2 40.009,-18.664 40.009,-21 40.159,-21.15 U3.8
  Top Layer w0.3: 25.502,6.698 23.877,5.073 U1.3 23.877,3.674 22.8,2.597 22.8,-1.699 23.171,-2.07 24.091,-2.07 R14.1 R13.1 ; U1.1 25.777,3.974 27.006,5.202 27.227,5.202 C2.2
  Top Layer w0.5: MH4.1 25.502,6.698 27.959,6.698 28.357,6.3 ; C2.2 27.427,5.452 28.275,6.3 28.357,6.3 ; 30.74,7.254 30.74,8.31 31.83,9.4 J1.3@31.83,10.675 ; J1.3@34.37,7.8 34.37,7.738 33.33,6.698 31.617,6.698 31.457,6.858 31.44,6.858 30.9,7.398 30.9,7.415 30.588,7.103 D2.1 30.538,5.75 29.948,5.75 29.398,6.3 28.357,6.3 ; v2(39.309,-17.577) 39.364,-17.633 39.922,-17.633 39.981,-17.692 40.026,-17.692 ; U6.5 40.879,-15.075 41.154,-15.35 R15.1
  Top Layer w0.75: D8.1 28.734,-16.925 29.5,-17.691 ; C6.2 32.025,-20.075 31.975,-20.075 31.948,-20.047 U4.3 U4.4 29.575,-18.777 29.5,-18.702 29.5,-17.691 ; v2(34.601,-17.561) 32.832,-17.561 32.701,-17.691 29.5,-17.691
  Bottom Layer w0.5: v2(34.601,-17.561) 34.609,-17.569 39.301,-17.569 v2(39.309,-17.577)
  Bottom Layer w1: J1.3@34.37,7.8 34.37,5.442 34.454,5.358 34.454,2.924 34.442,2.912 34.442,-17.402 v2(34.601,-17.561)
JD_PWR_DUT: C7.2 D8.2 R8.1 R11.1 U3.4 U4.5 U4.6 | length 26.5
  Top Layer w0.2: R11.1 22.679,-19.675 23.262,-19.092 23.262,-19.017 23.502,-18.777 U4.5 ; R8.1@31.7,-25.264 32.1,-25.664 32.7,-25.664 33.143,-25.222 33.143,-24.326 35.819,-21.65 U3.4
  Top Layer w0.5: U4.5 24.5,-18.084 D8.2
  Top Layer w0.75: U4.6 U4.5 24.575,-18.852 25.335,-18.852 26.6,-20.118 C7.2 26.625,-24.365 26.625,-25.075 27.064,-25.514 31.375,-25.514 31.7,-25.189 R8.1
JD_PWR_DUT2: D5.1 J3.3 R8.2 U3.5 | length 18.1
  Top Layer w0.2: R8.2 34.5,-23.56 35.91,-22.15 U3.5
  Top Layer w0.5: J3.3@31.83,-29.6 31.83,-29.538 32.71,-28.658 32.727,-28.658 33.152,-28.233 ; J3.3@34.37,-32.475 34.37,-31.2 35.312,-30.258 35.312,-28.792 ; R8.2 34.5,-25.464 33.152,-26.812 33.152,-28.233 ; D5.1 35.55,-27.55 35.5,-27.6 35.5,-28.404 35.212,-28.692 35.312,-28.792 ; 33.152,-28.233 33.577,-28.658 34.76,-28.658 34.894,-28.792 35.312,-28.792
JD_STATUS: R7.1 U2.2 | length 37
  Top Layer w0.15: R7.1 30.037,3.02 30.74,2.317 30.74,1.409 31.364,0.785 31.949,0.785 32.241,1.077 35.566,1.077 36.027,0.616 40.089,0.616 40.764,1.29 40.764,1.583 41.337,2.156 41.337,2.173 41.464,2.3 42.243,2.3 42.371,2.173 42.371,2.156 43.931,0.596 43.931,-2.467 44.257,-2.793 44.257,-4.34 43.717,-4.88 43.717,-5.178 43.59,-5.305 41.84,-7.055 34.853,-7.055 34.841,-7.067 33.311,-7.067 33.184,-6.94 33.184,-6.36 33.311,-6.233 33.328,-6.233 33.436,-6.125 33.951,-6.125 U2.2
LDO_EN: R3.1 U2.13 U4.2 | length 36.9
  Top Layer w0.15: U2.13 26.77,-2.1 26.42,-2.45 26.42,-2.487 26.215,-2.692 23.711,-2.692 23.595,-2.808 23.578,-2.808 23.404,-2.982 23.404,-2.999 21.865,-4.538 21.865,-16.304 21.912,-16.351 21.912,-16.368 22.13,-16.586 24.018,-16.586 24.58,-16.025 26.391,-16.025 26.601,-16.235 26.601,-16.252 27.386,-17.038 27.386,-19.803 28.9,-21.317 30.375,-21.317 30.6,-21.092 30.6,-21.088 30.688,-21 32.29,-21 32.573,-20.717 32.59,-20.717 32.717,-20.59 32.717,-20.573 33.165,-20.125 R3.1@34.797,-20.125
LDO_PG: U2.7 U4.8 | length 36.5
  Top Layer w0.15: U4.8 24.975,-22.587 25.2,-22.812 25.2,-24.62 26.843,-26.264 30.792,-26.264 30.958,-26.429 31.314,-26.429 31.688,-26.803 32.165,-26.803 v1(32.213,-26.85) ; v1(32.256,-8.812) 32.213,-8.769 32.213,-2.888 32.3,-2.8 34.026,-2.8 U2.7
  Bottom Layer w0.15: v1(32.213,-26.85) 32.234,-26.828 32.234,-8.834 v1(32.256,-8.812)
MOSI: U2.9 U5.3 | length 13.4
  Top Layer w0.15: U5.3 30.675,-12.065 31.018,-11.722 31.068,-11.722 31.472,-11.318 31.667,-11.123 31.667,-9.367 31.447,-9.147 31.447,-5.866 31.506,-5.808 31.506,-2.769 32.058,-2.216 32.33,-2.216 33.096,-1.45 U2.9
NetC1_2: C1.2 FB1.2 R1.1 | length 2.9
  Top Layer w0.3: C1.2 36.784,2.072 36.784,3.553 37.509,4.277 37.658,4.277 FB1.2
NetD4_2: D4.2 R6.1 | length 1.9
  Top Layer w0.15: R6.1@39.998,-4.238 41.15,-4.238 41.275,-4.113 41.275,-3.913 41.5,-3.688 D4.2
NetD4_3: D4.3 R5.1 | length 3.7
  Top Layer w0.15: R5.1@40.098,-2.15 41.352,-2.15 42.505,-3.303 42.505,-3.518 42.675,-3.688 D4.3
NetD4_4: D4.4 R4.1 | length 3.6
  Top Layer w0.15: R4.1@39.998,-6 41.678,-6 42.53,-5.148 42.665,-5.013 42.825,-5.013 D4.4
NetD7_2: D7.2 R7.2 | length 4.8
  Top Layer w0.15: R7.2 30.358,4.57 30.395,4.533 30.782,4.533 30.819,4.57 32.716,4.57 33.313,5.166 33.616,5.166 D7.2
NetR11_2: R11.2 R12.1 U4.7 | length 6.4
  Top Layer w0.2: R12.1 22.529,-17.275 22.229,-17.575 21.887,-17.917 21.887,-20.383 22.229,-20.725 22.529,-21.025 R11.2 22.696,-21.117 24.3,-21.117 U4.7
NetR12_2: R12.2 U5.7 | length 3.8
  Top Layer w0.2: R12.2 22.899,-15.63 22.899,-14.761 24.325,-13.335 U5.7
nRESET: J2.5 U2.6 | length 20.9
  Top Layer w0.15: v1(25.99,-6.927) 26.112,-6.927 26.284,-7.099 29.188,-7.099 30.922,-5.366 30.922,-2.527 32.758,-0.691 33.003,-0.691 33.311,-0.383 34.841,-0.383 35.083,-0.625 35.083,-2.908 34.968,-3.023 34.968,-3.04 34.733,-3.275 34.201,-3.275 U2.6
  Bottom Layer w0.15: J2.5 23.162,-5.319 23.672,-5.829 24.424,-5.829 24.436,-5.817 25.111,-5.817 25.904,-6.61 25.904,-6.841 v1(25.99,-6.927)
RGB_B: R4.2 U2.1 | length 4.7
  Top Layer w0.3: U2.1 37.824,-6.65 38.449,-6.025 R4.2@38.449,-6
RGB_G: R5.2 U2.14 | length 16.5
  Top Layer w0.15: v1(27.177,-2.641) 27.232,-2.695 28.271,-2.695 U2.14 ; v1(28.65,0.338) 28.772,0.338 28.927,0.493 32.069,0.493 32.361,0.785 35.325,0.785 35.786,0.324 36.899,0.324 38.019,-0.796 38.019,-1.819 R5.2@38.351,-2.15
  Bottom Layer w0.15: v1(27.177,-2.641) 27.177,-1.136 v1(28.65,0.338)
RGB_R: R6.2 U2.15 | length 17.8
  Top Layer w0.15: v1(26.974,-3.665) 27.096,-3.665 27.36,-3.4 U2.15 ; v1(30.113,-2.591) 30.113,-2.51 32.516,-0.107 32.761,-0.107 33.069,0.201 35.083,0.201 36.002,-0.718 36.19,-0.718 36.407,-0.935 36.513,-0.935 36.872,-1.294 v1(36.896,-1.294) ; v1(37.464,-4.238) R6.2@38.449,-4.238
  Bottom Layer w0.15: v1(26.974,-3.665) 27.06,-3.579 27.23,-3.579 28.218,-2.591 v1(30.113,-2.591) ; v1(36.896,-1.294) 37.401,-1.799 37.401,-4.175 v1(37.464,-4.238)
SCK: U2.8 U5.2 | length 14.2
  Top Layer w0.15: U5.2 30.675,-13.335 31.959,-12.051 31.959,-9.246 31.739,-9.026 31.739,-5.987 31.798,-5.928 31.798,-2.89 32.179,-2.508 32.451,-2.508 32.859,-2.1 U2.8
SCL: R13.2 U2.16 U3.10 | length 36.1
  Top Layer w0.15: R13.2 25.784,-3.425 26.54,-4.182 27.386,-4.182 27.426,-4.142 28.234,-4.142 U2.16 29.226,-4.05 29.441,-3.835 29.441,-2.532 32.158,0.185 32.64,0.185 32.948,0.493 35.204,0.493 36.123,-0.426 36.702,-0.426 v1(36.745,-0.383) ; v1(41.089,-18.852) 41.089,-18.974 41.325,-19.21 41.325,-20.14 U3.10
  Bottom Layer w0.15: v1(36.745,-0.383) 38.224,-1.861 38.224,-15.619 39.929,-17.324 39.929,-17.692 v1(41.089,-18.852)
SDA: R14.2 U2.17 U3.9 | length 38.9
  Top Layer w0.15: R14.2 24.171,-3.425 25.446,-4.7 U2.17 29.226,-4.7 30.63,-3.296 30.63,-2.406 32.637,-0.399 32.882,-0.399 33.19,-0.091 34.962,-0.091 38.132,-3.261 39.099,-3.261 v1(39.135,-3.225) ; U3.9 41.41,-20.575 42.092,-20.575 42.277,-20.39 42.277,-19.91 42.15,-19.783 42.149,-19.783 42.058,-19.692 42.058,-19.096 v1(42.062,-19.092)
  Bottom Layer w0.15: v1(39.135,-3.225) 39.135,-13.575 41.373,-15.812 41.373,-18.172 41.46,-18.259 41.534,-18.259 41.83,-18.555 41.83,-18.779 42.062,-19.011 v1(42.062,-19.092)
SPST_EN: R15.2 U2.11 U6.4 | length 36
  Top Layer w0.15: U2.11 28.27,-0.8 28.145,-0.675 28.145,0.111 28.133,0.123 28.133,0.552 28.145,0.564 28.145,2.683 28.782,3.32 28.782,3.491 28.909,3.618 29.902,3.618 29.914,3.606 33.251,3.606 34.02,2.837 34.57,2.837 34.751,3.019 v1(35.423,3.019) ; v1(40.674,-16.025) U6.4 41.579,-16.975 41.854,-16.7 R15.2
  Bottom Layer w0.15: v1(35.423,3.019) 35.424,3.018 35.424,2.312 35.711,2.025 35.711,1.919 38.618,-0.988 38.618,-13.97 v1(40.674,-16.025)
SWCLK: J2.4 U2.19 | length 3.8
  Top Layer w0.15: J2.4 25.345,-6 U2.19
SWDIO: J2.2 U2.18 | length 6.7
  Top Layer w0.15: J2.2 23.95,-7.054 23.95,-6.25 24.85,-5.35 U2.18
pads on no net: J1. J3. U1.4 U2.12 U5.5

## Keep-outs
Keep-Out Layer:
  region: 45.6,11.6 44.6,11.6 44.6,-33.4 45.6,-33.4
  rectangle: 20.6,-33.4 21.6,11.6

## Other copper
Top Layer:
  region net GND: 20.9,-28.685 20.9,-31 22.992,-33.093 25.315,-33.093 25.315,-30.916 23.085,-28.685
  text "Top Layer" at 50.35,30.6 h1.7
Bottom Layer:
  text "Bottom Layer" at 50.352,29.1 h1.7

## Silkscreen, mask and mechanical layers (free items; w line width, h text height)
Top Overlay:
  circle w0.254: c28.858,-14.615 r0.111
  text "Top Overlay" at 50.35,22.3 h1.7
Bottom Overlay:
  drawing of 194 lines, arcs and shapes, not listed
  text "Bottom Overlay" at 50.352,20.8 h1.7
  text "+" at 25.145,7.845 h3 r225
  text "'.ProjectCodenameID'-'.ProjectRevision'" at 43.1,-5.2 h1 r270
  text "'.ProjectCodename'" at 43.1,-24.2 h1 r270
  text "module(s) / under test" at 37.366,-27.794 h1
  text "-" at 24.407,-29.077 h3.7 r315
  text "-" at 41.252,-29.593 h3.7 r45
Top Paste:
  text "Top Paste" at 50.35,19.392 h1.7
Bottom Paste:
  text "Bottom Paste" at 50.352,17.914 h1.7
Top Solder:
  text "Top Solder (resist)" at 50.35,16.592 h1.7
Bottom Solder:
  text "Bottom Solder (resist)" at 50.352,15.103 h1.7
Fabrication notes:
  lines w0.1: 13.825,-29.043 58.3,-29.048 ; 14.625,7.245 59.1,7.25 ; 30.405,-32.5 31.005,-33.1 36.4,-33.1 ; 30.605,10.8 31.205,11.4 36.6,11.4 ; 31.2,-5.7 35.784,-10.284 35.784,-10.23 54.1,-10.23 ; 35.675,-32.375 36.4,-33.1 ; 35.875,10.675 36.6,11.4 ; 56.2,-33.1 41.03,-33.1 36.4,-33.1 ; 56.4,11.4 41.23,11.4 36.6,11.4 ; 57.3,-31.685 57.65,-32.035 ; 57.65,-29.056 57.65,-32.035 ; 58,-31.685 57.65,-32.035 ; 58.1,9.887 58.45,10.237 ; 58.45,7.258 58.45,10.237 ; 58.8,9.887 58.45,10.237
  text "Fabrication Notes" at 50.352,27.814 h1.7
  text "non-plated slots x2" at 46.202,11.892 h1.7
  text "no board edge pips/ / rat's teeth/mouse bites  / above this line - make  / sure board edge is clean" at 59.5,7.501 h1.7
  text "place any PCB manufacturer identifiers in this region on top layer, so they will be underneath the 20-TSSOP" at 55.1,-12.2 h1.7
  text "no board edge pips/ / rat's teeth/mouse bites  / below this line - make  / sure board edge is clean" at 58.7,-34.235 h1.7
  text "non-plated slots x2" at 46.202,-34.408 h1.7
Board Cutout:
  text "Board Cutout" at 62.852,26.349 h1.7
Board Outline: